# Altium PCB Card_Edge1.PcbDoc
Units mm, origin at the board's own origin, x right, y up, seen from the top; angles counter-clockwise.
Board outline 127 x 50 mm, 2 copper layers (Top Layer, Bottom Layer); 1 components, 0 nets, 242 pads, 0 vias.
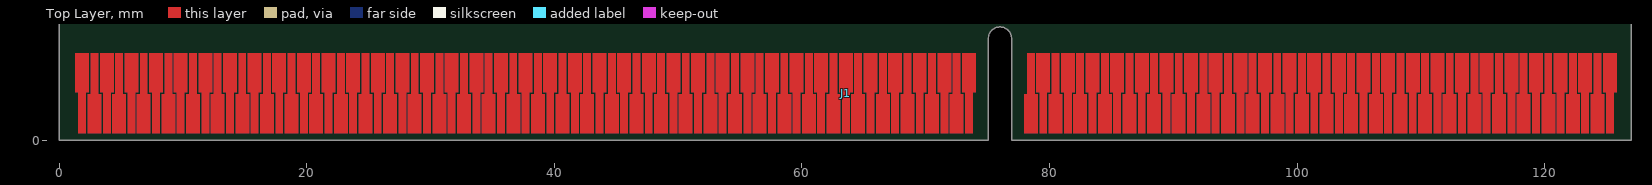
[diagram p0: Top Layer view]
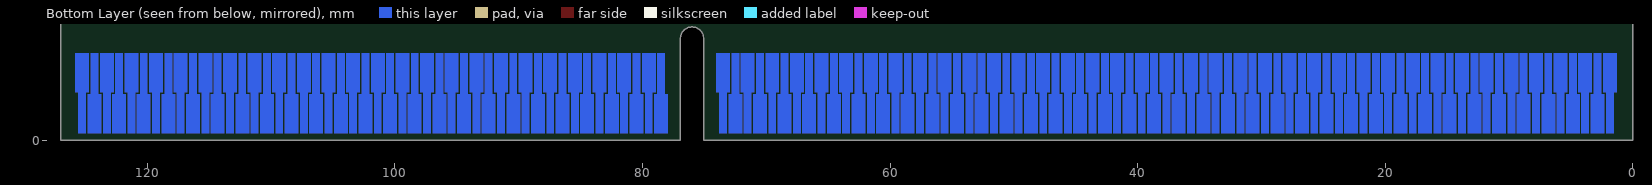
[diagram p1: Bottom Layer view, seen from below]

## Layer stack, top to bottom
Top Solder: solder mask 0.0102, Solder Resist, Dk 3.5
Top Layer: signal copper 0.0356
Dielectric 1: dielectric 0.32, FR-4, Dk 4.8
Bottom Layer: signal copper 0.0356
Bottom Solder: solder mask 0.0102, Solder Resist, Dk 3.5

## Board outline
0,0 0,50 127,50 127,0 76.94,0 76.94,8.2 ccw(c76,8.2) 75.06,8.2 75.06,0

## Design rules (kind name [scope] priority, off if disabled: settings)
Clearance [All] p1: gap=0.254 ignorepadtopadclearanceinfootprint=FALSE except(0: Arc-Hole Track-Hole SMDPad-Hole THPad-Hole Via-Hole Fill-Hole Poly-Hole Region-Hole Text-Hole; 0.127: SMDPad-SMDPad)
MinimumSolderMaskSliver [All] p1: minsoldermaskwidth=0.127
PolygonConnect [All] p1: connectstyle=Relief reliefconductorwidth=0.254 reliefentries=4 polygonreliefangle="90 Angle" airgapwidth=0.254
RoomDefinition Card_Edge1 [InComponentClass('Card_Edge1')] p1: confinementstyle=ConfineIn formatcopy=TRUE lockcomponents=FALSE outline 0.633,0 0.633,10.033 127.381,10.033 127.381,0
RoutingVias [All] p1: holewidth=0.711 width=1.27 viastyle="Through Hole" minholewidth=0.711 minwidth=1.27 maxholewidth=0.711 maxwidth=1.27
SolderMaskExpansion [All] p1: expansion=0.102 istentingtop=FALSE
Width [All] p1: maxlimit=0.254 minlimit=0.254 preferedwidth=0.254
29 further rules are at their usual default settings.

## Components (designator, comment, footprint, x,y, rotation, side; value= is the part's Value field where it differs from the comment)
J1 "Card_Edge1" PCBComponent_1 1.86,5.425 r0 top (schematic designator J)

## Footprints (in the part's own frame and the unit in brackets; to place one, negate y for a bottom-side part, rotate by r counter-clockwise, add the part's x,y. Pads: shape width x height; smd on the part's side, far side on the other; paste and mask are expansions set on the pad)
PCBComponent_1 [mil]
  round 1 smd mask+0: 1(0,0) 2(39.17,-129.92) 3(78.35,0) 4(117.52,-129.92) 5(156.69,0) 6(195.87,-129.92) 7(235.04,0) 8(274.21,-129.92) 9(313.39,0) 10(352.56,-129.92) 11(391.73,0) 12(430.91,-129.92) 13(470.08,0) 14(509.25,-129.92) 15(548.43,0) 16(587.6,-129.92) 17(626.77,0) 18(665.94,-129.92) 19(705.12,0) 20(744.29,-129.92) 21(783.46,0) 22(822.64,-129.92) 23(861.81,0) 24(900.98,-129.92) 25(940.16,0) 26(979.33,-129.92) 27(1018.5,0) 28(1057.68,-129.92) 29(1096.85,0) 30(1136.02,-129.92) 31(1175.2,0) 32(1214.37,-129.92) 33(1253.54,0) 34(1292.72,-129.92) 35(1331.89,0) 36(1371.06,-129.92) 37(1410.24,0) 38(1449.41,-129.92) 39(1488.58,0) 40(1527.76,-129.92) 41(1566.93,0) 42(1606.1,-129.92) 43(1645.28,0) 44(1684.45,-129.92) 45(1723.62,0) 46(1762.8,-129.92) 47(1801.97,0) 48(1841.14,-129.92) 49(1880.32,0) 50(1919.49,-129.92) 51(1958.66,0) 52(1997.83,-129.92) 53(2037.01,0) 54(2076.18,-129.92) 55(2115.35,0) 56(2154.53,-129.92) 57(2193.7,0) 58(2232.87,-129.92) 59(2272.05,0) 60(2311.22,-129.92) 61(2350.39,0) 62(2389.57,-129.92) 63(2428.74,0) 64(2467.91,-129.92) 65(2507.09,0) 66(2546.26,-129.92) 67(2585.43,0) 68(2624.61,-129.92) 69(2663.78,0) 70(2702.95,-129.92) 71(2742.13,0) 72(2781.3,-129.92) 73(2820.47,0) 74(3017.32,-129.92) 75(3056.5,0) 76(3095.67,-129.92) 77(3134.84,0) 78(3174.02,-129.92) 79(3213.19,0) 80(3252.36,-129.92) 81(3291.54,0) 82(3330.71,-129.92) 83(3369.88,0) 84(3409.06,-129.92) 85(3448.23,0) 86(3487.4,-129.92) 87(3526.57,0) 88(3565.75,-129.92) 89(3604.92,0) 90(3644.09,-129.92) 91(3683.27,0) 92(3722.44,-129.92) 93(3761.61,0) 94(3800.79,-129.92) 96(3879.13,-129.92) 97(3918.31,0) 98(3957.48,-129.92) 99(3996.65,0) 100(4035.83,-129.92) 101(4075,0) 102(4114.17,-129.92) 103(4153.35,0) 104(4192.52,-129.92) 105(4231.69,0) 106(4270.87,-129.92) 107(4310.04,0) 108(4349.21,-129.92) 109(4388.39,0) 110(4427.56,-129.92) 111(4466.73,0) 112(4505.91,-129.92) 113(4545.08,0) 114(4584.25,-129.92) 115(4623.43,0) 116(4662.6,-129.92) 117(4701.77,0) 118(4740.94,-129.92) 119(4780.12,0) 120(4819.29,-129.92) 121(4858.46,0)
  round 1 smd paste+0 mask+0: 95(3839.96,0)
  round 1 smd far side mask+0: 122(0,0) 123(39.17,-129.92) 124(78.35,0) 125(117.52,-129.92) 126(156.69,0) 127(195.87,-129.92) 128(235.04,0) 129(274.21,-129.92) 130(313.39,0) 131(352.56,-129.92) 132(391.73,0) 133(430.91,-129.92) 134(470.08,0) 135(509.25,-129.92) 136(548.43,0) 137(587.6,-129.92) 138(626.77,0) 139(665.94,-129.92) 140(705.12,0) 141(744.29,-129.92) 142(783.46,0) 143(822.64,-129.92) 144(861.81,0) 145(900.98,-129.92) 146(940.16,0) 147(979.33,-129.92) 148(1018.5,0) 149(1057.68,-129.92) 150(1096.85,0) 151(1136.02,-129.92) 152(1175.2,0) 153(1214.37,-129.92) 154(1253.54,0) 155(1292.72,-129.92) 156(1331.89,0) 157(1371.06,-129.92) 158(1410.24,0) 159(1449.41,-129.92) 160(1488.58,0) 161(1527.76,-129.92) 162(1566.93,0) 163(1606.1,-129.92) 164(1645.28,0) 165(1684.45,-129.92) 166(1723.62,0) 167(1762.8,-129.92) 168(1801.97,0) 169(1841.14,-129.92) 170(1880.32,0) 171(1919.49,-129.92) 172(1958.66,0) 173(1997.83,-129.92) 174(2037.01,0) 175(2076.18,-129.92) 176(2115.35,0) 177(2154.53,-129.92) 178(2193.7,0) 179(2232.87,-129.92) 180(2272.05,0) 181(2311.22,-129.92) 182(2350.39,0) 183(2389.57,-129.92) 184(2428.74,0) 185(2467.91,-129.92) 186(2507.09,0) 187(2546.26,-129.92) 188(2585.43,0) 189(2624.61,-129.92) 190(2663.78,0) 191(2702.95,-129.92) 192(2742.13,0) 193(2781.3,-129.92) 194(2820.47,0) 195(3017.32,-129.92) 196(3056.5,0) 198(3134.84,0) 200(3213.19,0) 202(3291.54,0) 204(3369.88,0) 206(3448.23,0) 208(3526.57,0) 210(3604.92,0) 212(3683.27,0) 214(3761.61,0) 216(3839.96,0) 218(3918.31,0) 220(3996.65,0) 222(4075,0) 224(4153.35,0) 226(4231.69,0) 228(4310.04,0) 230(4388.39,0) 232(4466.73,0) 234(4545.08,0) 236(4623.43,0) 238(4701.77,0) 240(4780.12,0) 242(4858.46,0) 257(3095.67,-129.92) 259(3174.02,-129.92) 261(3252.36,-129.92) 263(3330.71,-129.92) 265(3409.06,-129.92) 267(3487.4,-129.92) 269(3565.75,-129.92) 271(3644.09,-129.92) 273(3722.44,-129.92) 275(3800.79,-129.92) 277(3879.13,-129.92) 279(3957.48,-129.92) 281(4035.83,-129.92) 283(4114.17,-129.92) 285(4192.52,-129.92) 287(4270.87,-129.92) 289(4349.21,-129.92) 291(4427.56,-129.92) 293(4505.91,-129.92) 295(4584.25,-129.92) 297(4662.6,-129.92) 299(4740.94,-129.92) 301(4819.29,-129.92)
  Top Layer region: 21.46,62.01 21.46,-62.01 11.81,-62.01 11.81,-191.93 -11.81,-191.93 -11.81,-62.01 -21.46,-62.01 -21.46,62.01
  Top Layer region: 2841.93,62.01 2841.93,-62.01 2832.28,-62.01 2832.28,-191.93 2808.66,-191.93 2808.66,-62.01 2799.02,-62.01 2799.02,62.01
  Top Layer region: 2759.84,-191.93 2759.84,-67.91 2769.49,-67.91 2769.49,62.01 2793.11,62.01 2793.11,-67.91 2802.76,-67.91 2802.76,-191.93
  Top Layer region: 3077.95,62.01 3077.95,-62.01 3068.31,-62.01 3068.31,-191.93 3044.68,-191.93 3044.68,-62.01 3035.04,-62.01 3035.04,62.01
  Top Layer region: 2995.87,-191.93 2995.87,-67.91 3005.51,-67.91 3005.51,62.01 3029.13,62.01 3029.13,-67.91 3038.78,-67.91 3038.78,-191.93
  Top Layer region: 17.72,-191.93 17.72,-67.91 27.36,-67.91 27.36,62.01 50.98,62.01 50.98,-67.91 60.63,-67.91 60.63,-191.93
  Top Layer region: 4879.92,62.01 4879.92,-62.01 4870.28,-62.01 4870.28,-191.93 4846.65,-191.93 4846.65,-62.01 4837.01,-62.01 4837.01,62.01
  Top Layer region: 4801.57,62.01 4801.57,-62.01 4791.93,-62.01 4791.93,-191.93 4768.31,-191.93 4768.31,-62.01 4758.66,-62.01 4758.66,62.01
  Top Layer region: 4723.23,62.01 4723.23,-62.01 4713.58,-62.01 4713.58,-191.93 4689.96,-191.93 4689.96,-62.01 4680.31,-62.01 4680.31,62.01
  Top Layer region: 4644.88,62.01 4644.88,-62.01 4635.24,-62.01 4635.24,-191.93 4611.61,-191.93 4611.61,-62.01 4601.97,-62.01 4601.97,62.01
  Top Layer region: 4566.54,62.01 4566.54,-62.01 4556.89,-62.01 4556.89,-191.93 4533.27,-191.93 4533.27,-62.01 4523.62,-62.01 4523.62,62.01
  Top Layer region: 4488.19,62.01 4488.19,-62.01 4478.54,-62.01 4478.54,-191.93 4454.92,-191.93 4454.92,-62.01 4445.28,-62.01 4445.28,62.01
  Top Layer region: 4409.84,62.01 4409.84,-62.01 4400.2,-62.01 4400.2,-191.93 4376.57,-191.93 4376.57,-62.01 4366.93,-62.01 4366.93,62.01
  Top Layer region: 4331.5,62.01 4331.5,-62.01 4321.85,-62.01 4321.85,-191.93 4298.23,-191.93 4298.23,-62.01 4288.58,-62.01 4288.58,62.01
  Top Layer region: 4253.15,62.01 4253.15,-62.01 4243.5,-62.01 4243.5,-191.93 4219.88,-191.93 4219.88,-62.01 4210.24,-62.01 4210.24,62.01
  Top Layer region: 4174.8,62.01 4174.8,-62.01 4165.16,-62.01 4165.16,-191.93 4141.54,-191.93 4141.54,-62.01 4131.89,-62.01 4131.89,62.01
  Top Layer region: 4096.46,62.01 4096.46,-62.01 4086.81,-62.01 4086.81,-191.93 4063.19,-191.93 4063.19,-62.01 4053.54,-62.01 4053.54,62.01
  Top Layer region: 4018.11,62.01 4018.11,-62.01 4008.46,-62.01 4008.46,-191.93 3984.84,-191.93 3984.84,-62.01 3975.2,-62.01 3975.2,62.01
  Top Layer region: 3939.76,62.01 3939.76,-62.01 3930.12,-62.01 3930.12,-191.93 3906.5,-191.93 3906.5,-62.01 3896.85,-62.01 3896.85,62.01
  Top Layer region: 3861.42,62.01 3861.42,-62.01 3851.77,-62.01 3851.77,-191.93 3828.15,-191.93 3828.15,-62.01 3818.5,-62.01 3818.5,62.01
  Top Layer region: 3783.07,62.01 3783.07,-62.01 3773.42,-62.01 3773.42,-191.93 3749.8,-191.93 3749.8,-62.01 3740.16,-62.01 3740.16,62.01
  Top Layer region: 3704.72,62.01 3704.72,-62.01 3695.08,-62.01 3695.08,-191.93 3671.46,-191.93 3671.46,-62.01 3661.81,-62.01 3661.81,62.01
  Top Layer region: 3626.38,62.01 3626.38,-62.01 3616.73,-62.01 3616.73,-191.93 3593.11,-191.93 3593.11,-62.01 3583.46,-62.01 3583.46,62.01
  Top Layer region: 3548.03,62.01 3548.03,-62.01 3538.39,-62.01 3538.39,-191.93 3514.76,-191.93 3514.76,-62.01 3505.12,-62.01 3505.12,62.01
  Top Layer region: 3469.68,62.01 3469.68,-62.01 3460.04,-62.01 3460.04,-191.93 3436.42,-191.93 3436.42,-62.01 3426.77,-62.01 3426.77,62.01
  Top Layer region: 3391.34,62.01 3391.34,-62.01 3381.69,-62.01 3381.69,-191.93 3358.07,-191.93 3358.07,-62.01 3348.43,-62.01 3348.43,62.01
  Top Layer region: 3312.99,62.01 3312.99,-62.01 3303.35,-62.01 3303.35,-191.93 3279.72,-191.93 3279.72,-62.01 3270.08,-62.01 3270.08,62.01
  Top Layer region: 3234.65,62.01 3234.65,-62.01 3225,-62.01 3225,-191.93 3201.38,-191.93 3201.38,-62.01 3191.73,-62.01 3191.73,62.01
  Top Layer region: 4797.83,-191.93 4797.83,-67.91 4807.48,-67.91 4807.48,62.01 4831.1,62.01 4831.1,-67.91 4840.75,-67.91 4840.75,-191.93
  Top Layer region: 4719.49,-191.93 4719.49,-67.91 4729.13,-67.91 4729.13,62.01 4752.76,62.01 4752.76,-67.91 4762.4,-67.91 4762.4,-191.93
  Top Layer region: 4641.14,-191.93 4641.14,-67.91 4650.79,-67.91 4650.79,62.01 4674.41,62.01 4674.41,-67.91 4684.06,-67.91 4684.06,-191.93
  Top Layer region: 4562.8,-191.93 4562.8,-67.91 4572.44,-67.91 4572.44,62.01 4596.06,62.01 4596.06,-67.91 4605.71,-67.91 4605.71,-191.93
  Top Layer region: 4484.45,-191.93 4484.45,-67.91 4494.09,-67.91 4494.09,62.01 4517.72,62.01 4517.72,-67.91 4527.36,-67.91 4527.36,-191.93
  Top Layer region: 4406.1,-191.93 4406.1,-67.91 4415.75,-67.91 4415.75,62.01 4439.37,62.01 4439.37,-67.91 4449.02,-67.91 4449.02,-191.93
  Top Layer region: 4327.76,-191.93 4327.76,-67.91 4337.4,-67.91 4337.4,62.01 4361.02,62.01 4361.02,-67.91 4370.67,-67.91 4370.67,-191.93
  Top Layer region: 4249.41,-191.93 4249.41,-67.91 4259.06,-67.91 4259.06,62.01 4282.68,62.01 4282.68,-67.91 4292.32,-67.91 4292.32,-191.93
  Top Layer region: 4171.06,-191.93 4171.06,-67.91 4180.71,-67.91 4180.71,62.01 4204.33,62.01 4204.33,-67.91 4213.98,-67.91 4213.98,-191.93
  Top Layer region: 4092.72,-191.93 4092.72,-67.91 4102.36,-67.91 4102.36,62.01 4125.98,62.01 4125.98,-67.91 4135.63,-67.91 4135.63,-191.93
  Top Layer region: 4014.37,-191.93 4014.37,-67.91 4024.02,-67.91 4024.02,62.01 4047.64,62.01 4047.64,-67.91 4057.28,-67.91 4057.28,-191.93
  Top Layer region: 3936.02,-191.93 3936.02,-67.91 3945.67,-67.91 3945.67,62.01 3969.29,62.01 3969.29,-67.91 3978.94,-67.91 3978.94,-191.93
  Top Layer region: 3857.68,-191.93 3857.68,-67.91 3867.32,-67.91 3867.32,62.01 3890.94,62.01 3890.94,-67.91 3900.59,-67.91 3900.59,-191.93
  Top Layer region: 3779.33,-191.93 3779.33,-67.91 3788.98,-67.91 3788.98,62.01 3812.6,62.01 3812.6,-67.91 3822.24,-67.91 3822.24,-191.93
  Top Layer region: 3700.98,-191.93 3700.98,-67.91 3710.63,-67.91 3710.63,62.01 3734.25,62.01 3734.25,-67.91 3743.9,-67.91 3743.9,-191.93
  Top Layer region: 3622.64,-191.93 3622.64,-67.91 3632.28,-67.91 3632.28,62.01 3655.91,62.01 3655.91,-67.91 3665.55,-67.91 3665.55,-191.93
  Top Layer region: 3544.29,-191.93 3544.29,-67.91 3553.94,-67.91 3553.94,62.01 3577.56,62.01 3577.56,-67.91 3587.2,-67.91 3587.2,-191.93
  Top Layer region: 3465.94,-191.93 3465.94,-67.91 3475.59,-67.91 3475.59,62.01 3499.21,62.01 3499.21,-67.91 3508.86,-67.91 3508.86,-191.93
  Top Layer region: 3387.6,-191.93 3387.6,-67.91 3397.24,-67.91 3397.24,62.01 3420.87,62.01 3420.87,-67.91 3430.51,-67.91 3430.51,-191.93
  Top Layer region: 3309.25,-191.93 3309.25,-67.91 3318.9,-67.91 3318.9,62.01 3342.52,62.01 3342.52,-67.91 3352.17,-67.91 3352.17,-191.93
  Top Layer region: 3230.91,-191.93 3230.91,-67.91 3240.55,-67.91 3240.55,62.01 3264.17,62.01 3264.17,-67.91 3273.82,-67.91 3273.82,-191.93
  Top Layer region: 3152.56,-191.93 3152.56,-67.91 3162.2,-67.91 3162.2,62.01 3185.83,62.01 3185.83,-67.91 3195.47,-67.91 3195.47,-191.93
  Top Layer region: 3074.21,-191.93 3074.21,-67.91 3083.86,-67.91 3083.86,62.01 3107.48,62.01 3107.48,-67.91 3117.13,-67.91 3117.13,-191.93
  Top Layer region: 3156.3,62.01 3156.3,-62.01 3146.65,-62.01 3146.65,-191.93 3123.03,-191.93 3123.03,-62.01 3113.39,-62.01 3113.39,62.01
  Top Layer region: 2681.5,-191.93 2681.5,-67.91 2691.14,-67.91 2691.14,62.01 2714.76,62.01 2714.76,-67.91 2724.41,-67.91 2724.41,-191.93
  Top Layer region: 2603.15,-191.93 2603.15,-67.91 2612.8,-67.91 2612.8,62.01 2636.42,62.01 2636.42,-67.91 2646.06,-67.91 2646.06,-191.93
  Top Layer region: 2524.8,-191.93 2524.8,-67.91 2534.45,-67.91 2534.45,62.01 2558.07,62.01 2558.07,-67.91 2567.72,-67.91 2567.72,-191.93
  Top Layer region: 2446.46,-191.93 2446.46,-67.91 2456.1,-67.91 2456.1,62.01 2479.72,62.01 2479.72,-67.91 2489.37,-67.91 2489.37,-191.93
  Top Layer region: 2368.11,-191.93 2368.11,-67.91 2377.76,-67.91 2377.76,62.01 2401.38,62.01 2401.38,-67.91 2411.02,-67.91 2411.02,-191.93
  Top Layer region: 2289.76,-191.93 2289.76,-67.91 2299.41,-67.91 2299.41,62.01 2323.03,62.01 2323.03,-67.91 2332.68,-67.91 2332.68,-191.93
  Top Layer region: 2211.42,-191.93 2211.42,-67.91 2221.06,-67.91 2221.06,62.01 2244.68,62.01 2244.68,-67.91 2254.33,-67.91 2254.33,-191.93
  Top Layer region: 2133.07,-191.93 2133.07,-67.91 2142.72,-67.91 2142.72,62.01 2166.34,62.01 2166.34,-67.91 2175.98,-67.91 2175.98,-191.93
  Top Layer region: 2054.72,-191.93 2054.72,-67.91 2064.37,-67.91 2064.37,62.01 2087.99,62.01 2087.99,-67.91 2097.64,-67.91 2097.64,-191.93
  Top Layer region: 1976.38,-191.93 1976.38,-67.91 1986.02,-67.91 1986.02,62.01 2009.65,62.01 2009.65,-67.91 2019.29,-67.91 2019.29,-191.93
  Top Layer region: 1898.03,-191.93 1898.03,-67.91 1907.68,-67.91 1907.68,62.01 1931.3,62.01 1931.3,-67.91 1940.94,-67.91 1940.94,-191.93
  Top Layer region: 1819.69,-191.93 1819.69,-67.91 1829.33,-67.91 1829.33,62.01 1852.95,62.01 1852.95,-67.91 1862.6,-67.91 1862.6,-191.93
  Top Layer region: 1741.34,-191.93 1741.34,-67.91 1750.98,-67.91 1750.98,62.01 1774.61,62.01 1774.61,-67.91 1784.25,-67.91 1784.25,-191.93
  Top Layer region: 1662.99,-191.93 1662.99,-67.91 1672.64,-67.91 1672.64,62.01 1696.26,62.01 1696.26,-67.91 1705.91,-67.91 1705.91,-191.93
  Top Layer region: 1584.65,-191.93 1584.65,-67.91 1594.29,-67.91 1594.29,62.01 1617.91,62.01 1617.91,-67.91 1627.56,-67.91 1627.56,-191.93
  Top Layer region: 1506.3,-191.93 1506.3,-67.91 1515.94,-67.91 1515.94,62.01 1539.57,62.01 1539.57,-67.91 1549.21,-67.91 1549.21,-191.93
  Top Layer region: 1427.95,-191.93 1427.95,-67.91 1437.6,-67.91 1437.6,62.01 1461.22,62.01 1461.22,-67.91 1470.87,-67.91 1470.87,-191.93
  Top Layer region: 1349.61,-191.93 1349.61,-67.91 1359.25,-67.91 1359.25,62.01 1382.87,62.01 1382.87,-67.91 1392.52,-67.91 1392.52,-191.93
  Top Layer region: 1271.26,-191.93 1271.26,-67.91 1280.91,-67.91 1280.91,62.01 1304.53,62.01 1304.53,-67.91 1314.17,-67.91 1314.17,-191.93
  Top Layer region: 1192.91,-191.93 1192.91,-67.91 1202.56,-67.91 1202.56,62.01 1226.18,62.01 1226.18,-67.91 1235.83,-67.91 1235.83,-191.93
  Top Layer region: 1114.57,-191.93 1114.57,-67.91 1124.21,-67.91 1124.21,62.01 1147.83,62.01 1147.83,-67.91 1157.48,-67.91 1157.48,-191.93
  Top Layer region: 1036.22,-191.93 1036.22,-67.91 1045.87,-67.91 1045.87,62.01 1069.49,62.01 1069.49,-67.91 1079.13,-67.91 1079.13,-191.93
  Top Layer region: 957.87,-191.93 957.87,-67.91 967.52,-67.91 967.52,62.01 991.14,62.01 991.14,-67.91 1000.79,-67.91 1000.79,-191.93
  Top Layer region: 879.53,-191.93 879.53,-67.91 889.17,-67.91 889.17,62.01 912.8,62.01 912.8,-67.91 922.44,-67.91 922.44,-191.93
  Top Layer region: 801.18,-191.93 801.18,-67.91 810.83,-67.91 810.83,62.01 834.45,62.01 834.45,-67.91 844.09,-67.91 844.09,-191.93
  Top Layer region: 722.83,-191.93 722.83,-67.91 732.48,-67.91 732.48,62.01 756.1,62.01 756.1,-67.91 765.75,-67.91 765.75,-191.93
  Top Layer region: 644.49,-191.93 644.49,-67.91 654.13,-67.91 654.13,62.01 677.76,62.01 677.76,-67.91 687.4,-67.91 687.4,-191.93
  Top Layer region: 566.14,-191.93 566.14,-67.91 575.79,-67.91 575.79,62.01 599.41,62.01 599.41,-67.91 609.06,-67.91 609.06,-191.93
  Top Layer region: 487.8,-191.93 487.8,-67.91 497.44,-67.91 497.44,62.01 521.06,62.01 521.06,-67.91 530.71,-67.91 530.71,-191.93
  Top Layer region: 409.45,-191.93 409.45,-67.91 419.09,-67.91 419.09,62.01 442.72,62.01 442.72,-67.91 452.36,-67.91 452.36,-191.93
  Top Layer region: 331.1,-191.93 331.1,-67.91 340.75,-67.91 340.75,62.01 364.37,62.01 364.37,-67.91 374.02,-67.91 374.02,-191.93
  Top Layer region: 252.76,-191.93 252.76,-67.91 262.4,-67.91 262.4,62.01 286.02,62.01 286.02,-67.91 295.67,-67.91 295.67,-191.93
  Top Layer region: 174.41,-191.93 174.41,-67.91 184.06,-67.91 184.06,62.01 207.68,62.01 207.68,-67.91 217.32,-67.91 217.32,-191.93
  Top Layer region: 96.06,-191.93 96.06,-67.91 105.71,-67.91 105.71,62.01 129.33,62.01 129.33,-67.91 138.98,-67.91 138.98,-191.93
  Top Layer region: 2763.58,62.01 2763.58,-62.01 2753.94,-62.01 2753.94,-191.93 2730.31,-191.93 2730.31,-62.01 2720.67,-62.01 2720.67,62.01
  Top Layer region: 2685.24,62.01 2685.24,-62.01 2675.59,-62.01 2675.59,-191.93 2651.97,-191.93 2651.97,-62.01 2642.32,-62.01 2642.32,62.01
  Top Layer region: 2606.89,62.01 2606.89,-62.01 2597.24,-62.01 2597.24,-191.93 2573.62,-191.93 2573.62,-62.01 2563.98,-62.01 2563.98,62.01
  Top Layer region: 2528.54,62.01 2528.54,-62.01 2518.9,-62.01 2518.9,-191.93 2495.28,-191.93 2495.28,-62.01 2485.63,-62.01 2485.63,62.01
  Top Layer region: 2450.2,62.01 2450.2,-62.01 2440.55,-62.01 2440.55,-191.93 2416.93,-191.93 2416.93,-62.01 2407.28,-62.01 2407.28,62.01
  Top Layer region: 2371.85,62.01 2371.85,-62.01 2362.2,-62.01 2362.2,-191.93 2338.58,-191.93 2338.58,-62.01 2328.94,-62.01 2328.94,62.01
  Top Layer region: 2293.5,62.01 2293.5,-62.01 2283.86,-62.01 2283.86,-191.93 2260.24,-191.93 2260.24,-62.01 2250.59,-62.01 2250.59,62.01
  Top Layer region: 2215.16,62.01 2215.16,-62.01 2205.51,-62.01 2205.51,-191.93 2181.89,-191.93 2181.89,-62.01 2172.24,-62.01 2172.24,62.01
  Top Layer region: 2136.81,62.01 2136.81,-62.01 2127.17,-62.01 2127.17,-191.93 2103.54,-191.93 2103.54,-62.01 2093.9,-62.01 2093.9,62.01
  Top Layer region: 2058.46,62.01 2058.46,-62.01 2048.82,-62.01 2048.82,-191.93 2025.2,-191.93 2025.2,-62.01 2015.55,-62.01 2015.55,62.01
  Top Layer region: 1980.12,62.01 1980.12,-62.01 1970.47,-62.01 1970.47,-191.93 1946.85,-191.93 1946.85,-62.01 1937.2,-62.01 1937.2,62.01
  Top Layer region: 1901.77,62.01 1901.77,-62.01 1892.13,-62.01 1892.13,-191.93 1868.5,-191.93 1868.5,-62.01 1858.86,-62.01 1858.86,62.01
  Top Layer region: 1823.43,62.01 1823.43,-62.01 1813.78,-62.01 1813.78,-191.93 1790.16,-191.93 1790.16,-62.01 1780.51,-62.01 1780.51,62.01
  Top Layer region: 1745.08,62.01 1745.08,-62.01 1735.43,-62.01 1735.43,-191.93 1711.81,-191.93 1711.81,-62.01 1702.17,-62.01 1702.17,62.01
  Top Layer region: 1666.73,62.01 1666.73,-62.01 1657.09,-62.01 1657.09,-191.93 1633.46,-191.93 1633.46,-62.01 1623.82,-62.01 1623.82,62.01
  Top Layer region: 1588.39,62.01 1588.39,-62.01 1578.74,-62.01 1578.74,-191.93 1555.12,-191.93 1555.12,-62.01 1545.47,-62.01 1545.47,62.01
  Top Layer region: 1510.04,62.01 1510.04,-62.01 1500.39,-62.01 1500.39,-191.93 1476.77,-191.93 1476.77,-62.01 1467.13,-62.01 1467.13,62.01
  Top Layer region: 1431.69,62.01 1431.69,-62.01 1422.05,-62.01 1422.05,-191.93 1398.43,-191.93 1398.43,-62.01 1388.78,-62.01 1388.78,62.01
  Top Layer region: 1353.35,62.01 1353.35,-62.01 1343.7,-62.01 1343.7,-191.93 1320.08,-191.93 1320.08,-62.01 1310.43,-62.01 1310.43,62.01
  Top Layer region: 1275,62.01 1275,-62.01 1265.35,-62.01 1265.35,-191.93 1241.73,-191.93 1241.73,-62.01 1232.09,-62.01 1232.09,62.01
  Top Layer region: 1196.65,62.01 1196.65,-62.01 1187.01,-62.01 1187.01,-191.93 1163.39,-191.93 1163.39,-62.01 1153.74,-62.01 1153.74,62.01
  Top Layer region: 1118.31,62.01 1118.31,-62.01 1108.66,-62.01 1108.66,-191.93 1085.04,-191.93 1085.04,-62.01 1075.39,-62.01 1075.39,62.01
  Top Layer region: 1039.96,62.01 1039.96,-62.01 1030.31,-62.01 1030.31,-191.93 1006.69,-191.93 1006.69,-62.01 997.05,-62.01 997.05,62.01
  Top Layer region: 961.61,62.01 961.61,-62.01 951.97,-62.01 951.97,-191.93 928.35,-191.93 928.35,-62.01 918.7,-62.01 918.7,62.01
  Top Layer region: 883.27,62.01 883.27,-62.01 873.62,-62.01 873.62,-191.93 850,-191.93 850,-62.01 840.35,-62.01 840.35,62.01
  Top Layer region: 804.92,62.01 804.92,-62.01 795.28,-62.01 795.28,-191.93 771.65,-191.93 771.65,-62.01 762.01,-62.01 762.01,62.01
  Top Layer region: 726.57,62.01 726.57,-62.01 716.93,-62.01 716.93,-191.93 693.31,-191.93 693.31,-62.01 683.66,-62.01 683.66,62.01
  Top Layer region: 648.23,62.01 648.23,-62.01 638.58,-62.01 638.58,-191.93 614.96,-191.93 614.96,-62.01 605.31,-62.01 605.31,62.01
  Top Layer region: 569.88,62.01 569.88,-62.01 560.24,-62.01 560.24,-191.93 536.61,-191.93 536.61,-62.01 526.97,-62.01 526.97,62.01
  Top Layer region: 491.54,62.01 491.54,-62.01 481.89,-62.01 481.89,-191.93 458.27,-191.93 458.27,-62.01 448.62,-62.01 448.62,62.01
  Top Layer region: 413.19,62.01 413.19,-62.01 403.54,-62.01 403.54,-191.93 379.92,-191.93 379.92,-62.01 370.28,-62.01 370.28,62.01
  Top Layer region: 334.84,62.01 334.84,-62.01 325.2,-62.01 325.2,-191.93 301.57,-191.93 301.57,-62.01 291.93,-62.01 291.93,62.01
  Top Layer region: 256.5,62.01 256.5,-62.01 246.85,-62.01 246.85,-191.93 223.23,-191.93 223.23,-62.01 213.58,-62.01 213.58,62.01
  Top Layer region: 178.15,62.01 178.15,-62.01 168.5,-62.01 168.5,-191.93 144.88,-191.93 144.88,-62.01 135.24,-62.01 135.24,62.01
  Top Layer region: 99.8,62.01 99.8,-62.01 90.16,-62.01 90.16,-191.93 66.54,-191.93 66.54,-62.01 56.89,-62.01 56.89,62.01
  Bottom Layer region: 4879.92,62.01 4879.92,-62.01 4870.28,-62.01 4870.28,-191.93 4846.65,-191.93 4846.65,-62.01 4837.01,-62.01 4837.01,62.01
  Bottom Layer region: 4801.57,62.01 4801.57,-62.01 4791.93,-62.01 4791.93,-191.93 4768.31,-191.93 4768.31,-62.01 4758.66,-62.01 4758.66,62.01
  Bottom Layer region: 4723.23,62.01 4723.23,-62.01 4713.58,-62.01 4713.58,-191.93 4689.96,-191.93 4689.96,-62.01 4680.31,-62.01 4680.31,62.01
  Bottom Layer region: 4644.88,62.01 4644.88,-62.01 4635.24,-62.01 4635.24,-191.93 4611.61,-191.93 4611.61,-62.01 4601.97,-62.01 4601.97,62.01
  Bottom Layer region: 4566.54,62.01 4566.54,-62.01 4556.89,-62.01 4556.89,-191.93 4533.27,-191.93 4533.27,-62.01 4523.62,-62.01 4523.62,62.01
  Bottom Layer region: 4488.19,62.01 4488.19,-62.01 4478.54,-62.01 4478.54,-191.93 4454.92,-191.93 4454.92,-62.01 4445.28,-62.01 4445.28,62.01
  Bottom Layer region: 4409.84,62.01 4409.84,-62.01 4400.2,-62.01 4400.2,-191.93 4376.57,-191.93 4376.57,-62.01 4366.93,-62.01 4366.93,62.01
  Bottom Layer region: 4331.5,62.01 4331.5,-62.01 4321.85,-62.01 4321.85,-191.93 4298.23,-191.93 4298.23,-62.01 4288.58,-62.01 4288.58,62.01
  Bottom Layer region: 4253.15,62.01 4253.15,-62.01 4243.5,-62.01 4243.5,-191.93 4219.88,-191.93 4219.88,-62.01 4210.24,-62.01 4210.24,62.01
  Bottom Layer region: 4174.8,62.01 4174.8,-62.01 4165.16,-62.01 4165.16,-191.93 4141.54,-191.93 4141.54,-62.01 4131.89,-62.01 4131.89,62.01
  Bottom Layer region: 4096.46,62.01 4096.46,-62.01 4086.81,-62.01 4086.81,-191.93 4063.19,-191.93 4063.19,-62.01 4053.54,-62.01 4053.54,62.01
  Bottom Layer region: 4018.11,62.01 4018.11,-62.01 4008.46,-62.01 4008.46,-191.93 3984.84,-191.93 3984.84,-62.01 3975.2,-62.01 3975.2,62.01
  Bottom Layer region: 3939.76,62.01 3939.76,-62.01 3930.12,-62.01 3930.12,-191.93 3906.5,-191.93 3906.5,-62.01 3896.85,-62.01 3896.85,62.01
  Bottom Layer region: 3861.42,62.01 3861.42,-62.01 3851.77,-62.01 3851.77,-191.93 3828.15,-191.93 3828.15,-62.01 3818.5,-62.01 3818.5,62.01
  Bottom Layer region: 3783.07,62.01 3783.07,-62.01 3773.43,-62.01 3773.43,-191.93 3749.8,-191.93 3749.8,-62.01 3740.16,-62.01 3740.16,62.01
  Bottom Layer region: 3704.72,62.01 3704.72,-62.01 3695.08,-62.01 3695.08,-191.93 3671.46,-191.93 3671.46,-62.01 3661.81,-62.01 3661.81,62.01
  Bottom Layer region: 3626.38,62.01 3626.38,-62.01 3616.73,-62.01 3616.73,-191.93 3593.11,-191.93 3593.11,-62.01 3583.46,-62.01 3583.46,62.01
  Bottom Layer region: 3548.03,62.01 3548.03,-62.01 3538.39,-62.01 3538.39,-191.93 3514.76,-191.93 3514.76,-62.01 3505.12,-62.01 3505.12,62.01
  Bottom Layer region: 3469.68,62.01 3469.68,-62.01 3460.04,-62.01 3460.04,-191.93 3436.42,-191.93 3436.42,-62.01 3426.77,-62.01 3426.77,62.01
  Bottom Layer region: 3391.34,62.01 3391.34,-62.01 3381.69,-62.01 3381.69,-191.93 3358.07,-191.93 3358.07,-62.01 3348.43,-62.01 3348.43,62.01
  Bottom Layer region: 3312.99,62.01 3312.99,-62.01 3303.35,-62.01 3303.35,-191.93 3279.72,-191.93 3279.72,-62.01 3270.08,-62.01 3270.08,62.01
  Bottom Layer region: 3234.65,62.01 3234.65,-62.01 3225,-62.01 3225,-191.93 3201.38,-191.93 3201.38,-62.01 3191.73,-62.01 3191.73,62.01
  Bottom Layer region: 3156.3,62.01 3156.3,-62.01 3146.65,-62.01 3146.65,-191.93 3123.03,-191.93 3123.03,-62.01 3113.39,-62.01 3113.39,62.01
  Bottom Layer region: 4797.83,-191.93 4797.83,-67.91 4807.48,-67.91 4807.48,62.01 4831.1,62.01 4831.1,-67.91 4840.75,-67.91 4840.75,-191.93
  Bottom Layer region: 4719.49,-191.93 4719.49,-67.91 4729.13,-67.91 4729.13,62.01 4752.76,62.01 4752.76,-67.91 4762.4,-67.91 4762.4,-191.93
  Bottom Layer region: 4641.14,-191.93 4641.14,-67.91 4650.79,-67.91 4650.79,62.01 4674.41,62.01 4674.41,-67.91 4684.06,-67.91 4684.06,-191.93
  Bottom Layer region: 4562.8,-191.93 4562.8,-67.91 4572.44,-67.91 4572.44,62.01 4596.06,62.01 4596.06,-67.91 4605.71,-67.91 4605.71,-191.93
  Bottom Layer region: 4484.45,-191.93 4484.45,-67.91 4494.09,-67.91 4494.09,62.01 4517.72,62.01 4517.72,-67.91 4527.36,-67.91 4527.36,-191.93
  Bottom Layer region: 4406.1,-191.93 4406.1,-67.91 4415.75,-67.91 4415.75,62.01 4439.37,62.01 4439.37,-67.91 4449.02,-67.91 4449.02,-191.93
  Bottom Layer region: 4327.76,-191.93 4327.76,-67.91 4337.4,-67.91 4337.4,62.01 4361.02,62.01 4361.02,-67.91 4370.67,-67.91 4370.67,-191.93
  Bottom Layer region: 4249.41,-191.93 4249.41,-67.91 4259.06,-67.91 4259.06,62.01 4282.68,62.01 4282.68,-67.91 4292.32,-67.91 4292.32,-191.93
  Bottom Layer region: 4171.06,-191.93 4171.06,-67.91 4180.71,-67.91 4180.71,62.01 4204.33,62.01 4204.33,-67.91 4213.98,-67.91 4213.98,-191.93
  Bottom Layer region: 4092.72,-191.93 4092.72,-67.91 4102.36,-67.91 4102.36,62.01 4125.98,62.01 4125.98,-67.91 4135.63,-67.91 4135.63,-191.93
  Bottom Layer region: 4014.37,-191.93 4014.37,-67.91 4024.02,-67.91 4024.02,62.01 4047.64,62.01 4047.64,-67.91 4057.28,-67.91 4057.28,-191.93
  Bottom Layer region: 3936.02,-191.93 3936.02,-67.91 3945.67,-67.91 3945.67,62.01 3969.29,62.01 3969.29,-67.91 3978.94,-67.91 3978.94,-191.93
  Bottom Layer region: 3857.68,-191.93 3857.68,-67.91 3867.32,-67.91 3867.32,62.01 3890.94,62.01 3890.94,-67.91 3900.59,-67.91 3900.59,-191.93
  Bottom Layer region: 3779.33,-191.93 3779.33,-67.91 3788.98,-67.91 3788.98,62.01 3812.6,62.01 3812.6,-67.91 3822.24,-67.91 3822.24,-191.93
  Bottom Layer region: 3700.98,-191.93 3700.98,-67.91 3710.63,-67.91 3710.63,62.01 3734.25,62.01 3734.25,-67.91 3743.9,-67.91 3743.9,-191.93
  Bottom Layer region: 3622.64,-191.93 3622.64,-67.91 3632.28,-67.91 3632.28,62.01 3655.91,62.01 3655.91,-67.91 3665.55,-67.91 3665.55,-191.93
  Bottom Layer region: 3544.29,-191.93 3544.29,-67.91 3553.94,-67.91 3553.94,62.01 3577.56,62.01 3577.56,-67.91 3587.2,-67.91 3587.2,-191.93
  Bottom Layer region: 3465.94,-191.93 3465.94,-67.91 3475.59,-67.91 3475.59,62.01 3499.21,62.01 3499.21,-67.91 3508.86,-67.91 3508.86,-191.93
  Bottom Layer region: 3387.6,-191.93 3387.6,-67.91 3397.24,-67.91 3397.24,62.01 3420.87,62.01 3420.87,-67.91 3430.51,-67.91 3430.51,-191.93
  Bottom Layer region: 3309.25,-191.93 3309.25,-67.91 3318.9,-67.91 3318.9,62.01 3342.52,62.01 3342.52,-67.91 3352.17,-67.91 3352.17,-191.93
  Bottom Layer region: 3230.91,-191.93 3230.91,-67.91 3240.55,-67.91 3240.55,62.01 3264.17,62.01 3264.17,-67.91 3273.82,-67.91 3273.82,-191.93
  Bottom Layer region: 3152.56,-191.93 3152.56,-67.91 3162.2,-67.91 3162.2,62.01 3185.83,62.01 3185.83,-67.91 3195.47,-67.91 3195.47,-191.93
  Bottom Layer region: 3074.21,-191.93 3074.21,-67.91 3083.86,-67.91 3083.86,62.01 3107.48,62.01 3107.48,-67.91 3117.13,-67.91 3117.13,-191.93
  Bottom Layer region: 3077.95,62.01 3077.95,-62.01 3068.31,-62.01 3068.31,-191.93 3044.68,-191.93 3044.68,-62.01 3035.04,-62.01 3035.04,62.01
  Bottom Layer region: 2995.87,-191.93 2995.87,-67.91 3005.51,-67.91 3005.51,62.01 3029.13,62.01 3029.13,-67.91 3038.78,-67.91 3038.78,-191.93
  Bottom Layer region: 2759.84,-191.93 2759.84,-67.91 2769.49,-67.91 2769.49,62.01 2793.11,62.01 2793.11,-67.91 2802.76,-67.91 2802.76,-191.93
  Bottom Layer region: 2681.5,-191.93 2681.5,-67.91 2691.14,-67.91 2691.14,62.01 2714.76,62.01 2714.76,-67.91 2724.41,-67.91 2724.41,-191.93
  Bottom Layer region: 2603.15,-191.93 2603.15,-67.91 2612.8,-67.91 2612.8,62.01 2636.42,62.01 2636.42,-67.91 2646.06,-67.91 2646.06,-191.93
  Bottom Layer region: 2524.8,-191.93 2524.8,-67.91 2534.45,-67.91 2534.45,62.01 2558.07,62.01 2558.07,-67.91 2567.72,-67.91 2567.72,-191.93
  Bottom Layer region: 2446.46,-191.93 2446.46,-67.91 2456.1,-67.91 2456.1,62.01 2479.72,62.01 2479.72,-67.91 2489.37,-67.91 2489.37,-191.93
  Bottom Layer region: 2368.11,-191.93 2368.11,-67.91 2377.76,-67.91 2377.76,62.01 2401.38,62.01 2401.38,-67.91 2411.02,-67.91 2411.02,-191.93
  Bottom Layer region: 2289.76,-191.93 2289.76,-67.91 2299.41,-67.91 2299.41,62.01 2323.03,62.01 2323.03,-67.91 2332.68,-67.91 2332.68,-191.93
  Bottom Layer region: 2211.42,-191.93 2211.42,-67.91 2221.06,-67.91 2221.06,62.01 2244.68,62.01 2244.68,-67.91 2254.33,-67.91 2254.33,-191.93
  Bottom Layer region: 2133.07,-191.93 2133.07,-67.91 2142.72,-67.91 2142.72,62.01 2166.34,62.01 2166.34,-67.91 2175.98,-67.91 2175.98,-191.93
  Bottom Layer region: 2054.72,-191.93 2054.72,-67.91 2064.37,-67.91 2064.37,62.01 2087.99,62.01 2087.99,-67.91 2097.64,-67.91 2097.64,-191.93
  Bottom Layer region: 1976.38,-191.93 1976.38,-67.91 1986.02,-67.91 1986.02,62.01 2009.65,62.01 2009.65,-67.91 2019.29,-67.91 2019.29,-191.93
  Bottom Layer region: 1898.03,-191.93 1898.03,-67.91 1907.68,-67.91 1907.68,62.01 1931.3,62.01 1931.3,-67.91 1940.94,-67.91 1940.94,-191.93
  Bottom Layer region: 1819.69,-191.93 1819.69,-67.91 1829.33,-67.91 1829.33,62.01 1852.95,62.01 1852.95,-67.91 1862.6,-67.91 1862.6,-191.93
  Bottom Layer region: 1741.34,-191.93 1741.34,-67.91 1750.98,-67.91 1750.98,62.01 1774.61,62.01 1774.61,-67.91 1784.25,-67.91 1784.25,-191.93
  Bottom Layer region: 1662.99,-191.93 1662.99,-67.91 1672.64,-67.91 1672.64,62.01 1696.26,62.01 1696.26,-67.91 1705.91,-67.91 1705.91,-191.93
  Bottom Layer region: 1584.65,-191.93 1584.65,-67.91 1594.29,-67.91 1594.29,62.01 1617.91,62.01 1617.91,-67.91 1627.56,-67.91 1627.56,-191.93
  Bottom Layer region: 1506.3,-191.93 1506.3,-67.91 1515.94,-67.91 1515.94,62.01 1539.57,62.01 1539.57,-67.91 1549.21,-67.91 1549.21,-191.93
  Bottom Layer region: 1427.95,-191.93 1427.95,-67.91 1437.6,-67.91 1437.6,62.01 1461.22,62.01 1461.22,-67.91 1470.87,-67.91 1470.87,-191.93
  Bottom Layer region: 1349.61,-191.93 1349.61,-67.91 1359.25,-67.91 1359.25,62.01 1382.87,62.01 1382.87,-67.91 1392.52,-67.91 1392.52,-191.93
  Bottom Layer region: 1271.26,-191.93 1271.26,-67.91 1280.91,-67.91 1280.91,62.01 1304.53,62.01 1304.53,-67.91 1314.17,-67.91 1314.17,-191.93
  Bottom Layer region: 1192.91,-191.93 1192.91,-67.91 1202.56,-67.91 1202.56,62.01 1226.18,62.01 1226.18,-67.91 1235.83,-67.91 1235.83,-191.93
  Bottom Layer region: 1114.57,-191.93 1114.57,-67.91 1124.21,-67.91 1124.21,62.01 1147.83,62.01 1147.83,-67.91 1157.48,-67.91 1157.48,-191.93
  Bottom Layer region: 1036.22,-191.93 1036.22,-67.91 1045.87,-67.91 1045.87,62.01 1069.49,62.01 1069.49,-67.91 1079.13,-67.91 1079.13,-191.93
  Bottom Layer region: 957.87,-191.93 957.87,-67.91 967.52,-67.91 967.52,62.01 991.14,62.01 991.14,-67.91 1000.79,-67.91 1000.79,-191.93
  Bottom Layer region: 879.53,-191.93 879.53,-67.91 889.17,-67.91 889.17,62.01 912.8,62.01 912.8,-67.91 922.44,-67.91 922.44,-191.93
  Bottom Layer region: 801.18,-191.93 801.18,-67.91 810.83,-67.91 810.83,62.01 834.45,62.01 834.45,-67.91 844.09,-67.91 844.09,-191.93
  Bottom Layer region: 722.83,-191.93 722.83,-67.91 732.48,-67.91 732.48,62.01 756.1,62.01 756.1,-67.91 765.75,-67.91 765.75,-191.93
  Bottom Layer region: 644.49,-191.93 644.49,-67.91 654.13,-67.91 654.13,62.01 677.76,62.01 677.76,-67.91 687.4,-67.91 687.4,-191.93
  Bottom Layer region: 566.14,-191.93 566.14,-67.91 575.79,-67.91 575.79,62.01 599.41,62.01 599.41,-67.91 609.06,-67.91 609.06,-191.93
  Bottom Layer region: 487.8,-191.93 487.8,-67.91 497.44,-67.91 497.44,62.01 521.06,62.01 521.06,-67.91 530.71,-67.91 530.71,-191.93
  Bottom Layer region: 409.45,-191.93 409.45,-67.91 419.09,-67.91 419.09,62.01 442.72,62.01 442.72,-67.91 452.36,-67.91 452.36,-191.93
  Bottom Layer region: 331.1,-191.93 331.1,-67.91 340.75,-67.91 340.75,62.01 364.37,62.01 364.37,-67.91 374.02,-67.91 374.02,-191.93
  Bottom Layer region: 252.76,-191.93 252.76,-67.91 262.4,-67.91 262.4,62.01 286.02,62.01 286.02,-67.91 295.67,-67.91 295.67,-191.93
  Bottom Layer region: 174.41,-191.93 174.41,-67.91 184.06,-67.91 184.06,62.01 207.68,62.01 207.68,-67.91 217.32,-67.91 217.32,-191.93
  Bottom Layer region: 96.06,-191.93 96.06,-67.91 105.71,-67.91 105.71,62.01 129.33,62.01 129.33,-67.91 138.98,-67.91 138.98,-191.93
  Bottom Layer region: 2841.93,62.01 2841.93,-62.01 2832.28,-62.01 2832.28,-191.93 2808.66,-191.93 2808.66,-62.01 2799.02,-62.01 2799.02,62.01
  Bottom Layer region: 2763.58,62.01 2763.58,-62.01 2753.94,-62.01 2753.94,-191.93 2730.31,-191.93 2730.31,-62.01 2720.67,-62.01 2720.67,62.01
  Bottom Layer region: 2685.24,62.01 2685.24,-62.01 2675.59,-62.01 2675.59,-191.93 2651.97,-191.93 2651.97,-62.01 2642.32,-62.01 2642.32,62.01
  Bottom Layer region: 2606.89,62.01 2606.89,-62.01 2597.24,-62.01 2597.24,-191.93 2573.62,-191.93 2573.62,-62.01 2563.98,-62.01 2563.98,62.01
  Bottom Layer region: 2528.54,62.01 2528.54,-62.01 2518.9,-62.01 2518.9,-191.93 2495.28,-191.93 2495.28,-62.01 2485.63,-62.01 2485.63,62.01
  Bottom Layer region: 2450.2,62.01 2450.2,-62.01 2440.55,-62.01 2440.55,-191.93 2416.93,-191.93 2416.93,-62.01 2407.28,-62.01 2407.28,62.01
  Bottom Layer region: 2371.85,62.01 2371.85,-62.01 2362.2,-62.01 2362.2,-191.93 2338.58,-191.93 2338.58,-62.01 2328.94,-62.01 2328.94,62.01
  Bottom Layer region: 2293.5,62.01 2293.5,-62.01 2283.86,-62.01 2283.86,-191.93 2260.24,-191.93 2260.24,-62.01 2250.59,-62.01 2250.59,62.01
  Bottom Layer region: 2215.16,62.01 2215.16,-62.01 2205.51,-62.01 2205.51,-191.93 2181.89,-191.93 2181.89,-62.01 2172.24,-62.01 2172.24,62.01
  Bottom Layer region: 2136.81,62.01 2136.81,-62.01 2127.17,-62.01 2127.17,-191.93 2103.54,-191.93 2103.54,-62.01 2093.9,-62.01 2093.9,62.01
  Bottom Layer region: 2058.46,62.01 2058.46,-62.01 2048.82,-62.01 2048.82,-191.93 2025.2,-191.93 2025.2,-62.01 2015.55,-62.01 2015.55,62.01
  Bottom Layer region: 1980.12,62.01 1980.12,-62.01 1970.47,-62.01 1970.47,-191.93 1946.85,-191.93 1946.85,-62.01 1937.2,-62.01 1937.2,62.01
  Bottom Layer region: 1901.77,62.01 1901.77,-62.01 1892.13,-62.01 1892.13,-191.93 1868.5,-191.93 1868.5,-62.01 1858.86,-62.01 1858.86,62.01
  Bottom Layer region: 1823.43,62.01 1823.43,-62.01 1813.78,-62.01 1813.78,-191.93 1790.16,-191.93 1790.16,-62.01 1780.51,-62.01 1780.51,62.01
  Bottom Layer region: 1745.08,62.01 1745.08,-62.01 1735.43,-62.01 1735.43,-191.93 1711.81,-191.93 1711.81,-62.01 1702.17,-62.01 1702.17,62.01
  Bottom Layer region: 1666.73,62.01 1666.73,-62.01 1657.09,-62.01 1657.09,-191.93 1633.46,-191.93 1633.46,-62.01 1623.82,-62.01 1623.82,62.01
  Bottom Layer region: 1588.39,62.01 1588.39,-62.01 1578.74,-62.01 1578.74,-191.93 1555.12,-191.93 1555.12,-62.01 1545.47,-62.01 1545.47,62.01
  Bottom Layer region: 1510.04,62.01 1510.04,-62.01 1500.39,-62.01 1500.39,-191.93 1476.77,-191.93 1476.77,-62.01 1467.13,-62.01 1467.13,62.01
  Bottom Layer region: 1431.69,62.01 1431.69,-62.01 1422.05,-62.01 1422.05,-191.93 1398.43,-191.93 1398.43,-62.01 1388.78,-62.01 1388.78,62.01
  Bottom Layer region: 1353.35,62.01 1353.35,-62.01 1343.7,-62.01 1343.7,-191.93 1320.08,-191.93 1320.08,-62.01 1310.43,-62.01 1310.43,62.01
  Bottom Layer region: 1275,62.01 1275,-62.01 1265.35,-62.01 1265.35,-191.93 1241.73,-191.93 1241.73,-62.01 1232.09,-62.01 1232.09,62.01
  Bottom Layer region: 1196.65,62.01 1196.65,-62.01 1187.01,-62.01 1187.01,-191.93 1163.39,-191.93 1163.39,-62.01 1153.74,-62.01 1153.74,62.01
  Bottom Layer region: 1118.31,62.01 1118.31,-62.01 1108.66,-62.01 1108.66,-191.93 1085.04,-191.93 1085.04,-62.01 1075.39,-62.01 1075.39,62.01
  Bottom Layer region: 1039.96,62.01 1039.96,-62.01 1030.31,-62.01 1030.31,-191.93 1006.69,-191.93 1006.69,-62.01 997.05,-62.01 997.05,62.01
  Bottom Layer region: 961.61,62.01 961.61,-62.01 951.97,-62.01 951.97,-191.93 928.35,-191.93 928.35,-62.01 918.7,-62.01 918.7,62.01
  Bottom Layer region: 883.27,62.01 883.27,-62.01 873.62,-62.01 873.62,-191.93 850,-191.93 850,-62.01 840.35,-62.01 840.35,62.01
  Bottom Layer region: 804.92,62.01 804.92,-62.01 795.28,-62.01 795.28,-191.93 771.65,-191.93 771.65,-62.01 762.01,-62.01 762.01,62.01
  Bottom Layer region: 726.57,62.01 726.57,-62.01 716.93,-62.01 716.93,-191.93 693.31,-191.93 693.31,-62.01 683.66,-62.01 683.66,62.01
  Bottom Layer region: 648.23,62.01 648.23,-62.01 638.58,-62.01 638.58,-191.93 614.96,-191.93 614.96,-62.01 605.31,-62.01 605.31,62.01
  Bottom Layer region: 569.88,62.01 569.88,-62.01 560.24,-62.01 560.24,-191.93 536.61,-191.93 536.61,-62.01 526.97,-62.01 526.97,62.01
  Bottom Layer region: 491.54,62.01 491.54,-62.01 481.89,-62.01 481.89,-191.93 458.27,-191.93 458.27,-62.01 448.62,-62.01 448.62,62.01
  Bottom Layer region: 413.19,62.01 413.19,-62.01 403.54,-62.01 403.54,-191.93 379.92,-191.93 379.92,-62.01 370.28,-62.01 370.28,62.01
  Bottom Layer region: 334.84,62.01 334.84,-62.01 325.2,-62.01 325.2,-191.93 301.57,-191.93 301.57,-62.01 291.93,-62.01 291.93,62.01
  Bottom Layer region: 256.5,62.01 256.5,-62.01 246.85,-62.01 246.85,-191.93 223.23,-191.93 223.23,-62.01 213.58,-62.01 213.58,62.01
  Bottom Layer region: 178.15,62.01 178.15,-62.01 168.5,-62.01 168.5,-191.93 144.88,-191.93 144.88,-62.01 135.24,-62.01 135.24,62.01
  Bottom Layer region: 99.8,62.01 99.8,-62.01 90.16,-62.01 90.16,-191.93 66.54,-191.93 66.54,-62.01 56.89,-62.01 56.89,62.01
  Bottom Layer region: 17.72,-191.93 17.72,-67.91 27.36,-67.91 27.36,62.01 50.98,62.01 50.98,-67.91 60.63,-67.91 60.63,-191.93
  Bottom Layer region: 21.46,62.01 21.46,-62.01 11.81,-62.01 11.81,-191.93 -11.81,-191.93 -11.81,-62.01 -21.46,-62.01 -21.46,62.01

## Nets (pads, with @x,y where several pads share a name; then routed paths per layer and width w, separated by ;. In a path a pad name is that pad's centre, name@x,y a point inside that pad or via, vN(x,y) a via of type N, cw(c..) or ccw(c..) an arc to the next point about the centre after c; other vN are vias at no path point)
pads on no net: J1.1 J1.2 J1.3 J1.4 J1.5 J1.6 J1.7 J1.8 J1.9 J1.10 J1.11 J1.12 J1.13 J1.14 J1.15 J1.16 J1.17 J1.18 J1.19 J1.20 J1.21 J1.22 J1.23 J1.24 J1.25 J1.26 J1.27 J1.28 J1.29 J1.30 J1.31 J1.32 J1.33 J1.34 J1.35 J1.36 J1.37 J1.38 J1.39 J1.40 J1.41 J1.42 J1.43 J1.44 J1.45 J1.46 J1.47 J1.48 J1.49 J1.50 J1.51 J1.52 J1.53 J1.54 J1.55 J1.56 J1.57 J1.58 J1.59 J1.60 J1.61 J1.62 J1.63 J1.64 J1.65 J1.66 J1.67 J1.68 J1.69 J1.70 J1.71 J1.72 J1.73 J1.74 J1.75 J1.76 J1.77 J1.78 J1.79 J1.80 J1.81 J1.82 J1.83 J1.84 J1.85 J1.86 J1.87 J1.88 J1.89 J1.90 J1.91 J1.92 J1.93 J1.94 J1.95 J1.96 J1.97 J1.98 J1.99 J1.100 J1.101 J1.102 J1.103 J1.104 J1.105 J1.106 J1.107 J1.108 J1.109 J1.110 J1.111 J1.112 J1.113 J1.114 J1.115 J1.116 J1.117 J1.118 J1.119 J1.120 J1.121 J1.122 J1.123 J1.124 J1.125 J1.126 J1.127 J1.128 J1.129 J1.130 J1.131 J1.132 J1.133 J1.134 J1.135 J1.136 J1.137 J1.138 J1.139 J1.140 J1.141 J1.142 J1.143 J1.144 J1.145 J1.146 J1.147 J1.148 J1.149 J1.150 J1.151 J1.152 J1.153 J1.154 J1.155 J1.156 J1.157 J1.158 J1.159 J1.160 J1.161 J1.162 J1.163 J1.164 J1.165 J1.166 J1.167 J1.168 J1.169 J1.170 J1.171 J1.172 J1.173 J1.174 J1.175 J1.176 J1.177 J1.178 J1.179 J1.180 J1.181 J1.182 J1.183 J1.184 J1.185 J1.186 J1.187 J1.188 J1.189 J1.190 J1.191 J1.192 J1.193 J1.194 J1.195 J1.196 J1.198 J1.200 J1.202 J1.204 J1.206 J1.208 J1.210 J1.212 J1.214 J1.216 J1.218 J1.220 J1.222 J1.224 J1.226 J1.228 J1.230 J1.232 J1.234 J1.236 J1.238 J1.240 J1.242 J1.257 J1.259 J1.261 J1.263 J1.265 J1.267 J1.269 J1.271 J1.273 J1.275 J1.277 J1.279 J1.281 J1.283 J1.285 J1.287 J1.289 J1.291 J1.293 J1.295 J1.297 J1.299 J1.301

## Silkscreen, mask and mechanical layers (free items; w line width, h text height)
Top Overlay:
  text "Card Edge Connector Test Board- V1" at 122.984,11.049 h1 r90
  text "Designed by Roberto SDSU Mechatronics" at 125.524,11.049 h1 r90
Mechanical 1:
  lines w0.013: 0,0 0,50 127,50 127,0 76.94,0 76.94,8.2 ccw(c76,8.2) 75.06,8.2 75.06,0 0,0
  lines w0.1: 0,0 75.06,0 75.06,8.2 cw(c76,8.2) 76.94,8.2 76.94,0 127,0 127,50 0,50 0,0